# Altium PCB DC-DC_Buck_Converter.PcbDoc
Units mm, origin at the board's own origin, x right, y up, seen from the top; angles counter-clockwise.
Board outline 35 x 20 mm, 2 copper layers (Top Layer, Bottom Layer); 21 components, 14 nets, 80 pads, 0 vias.
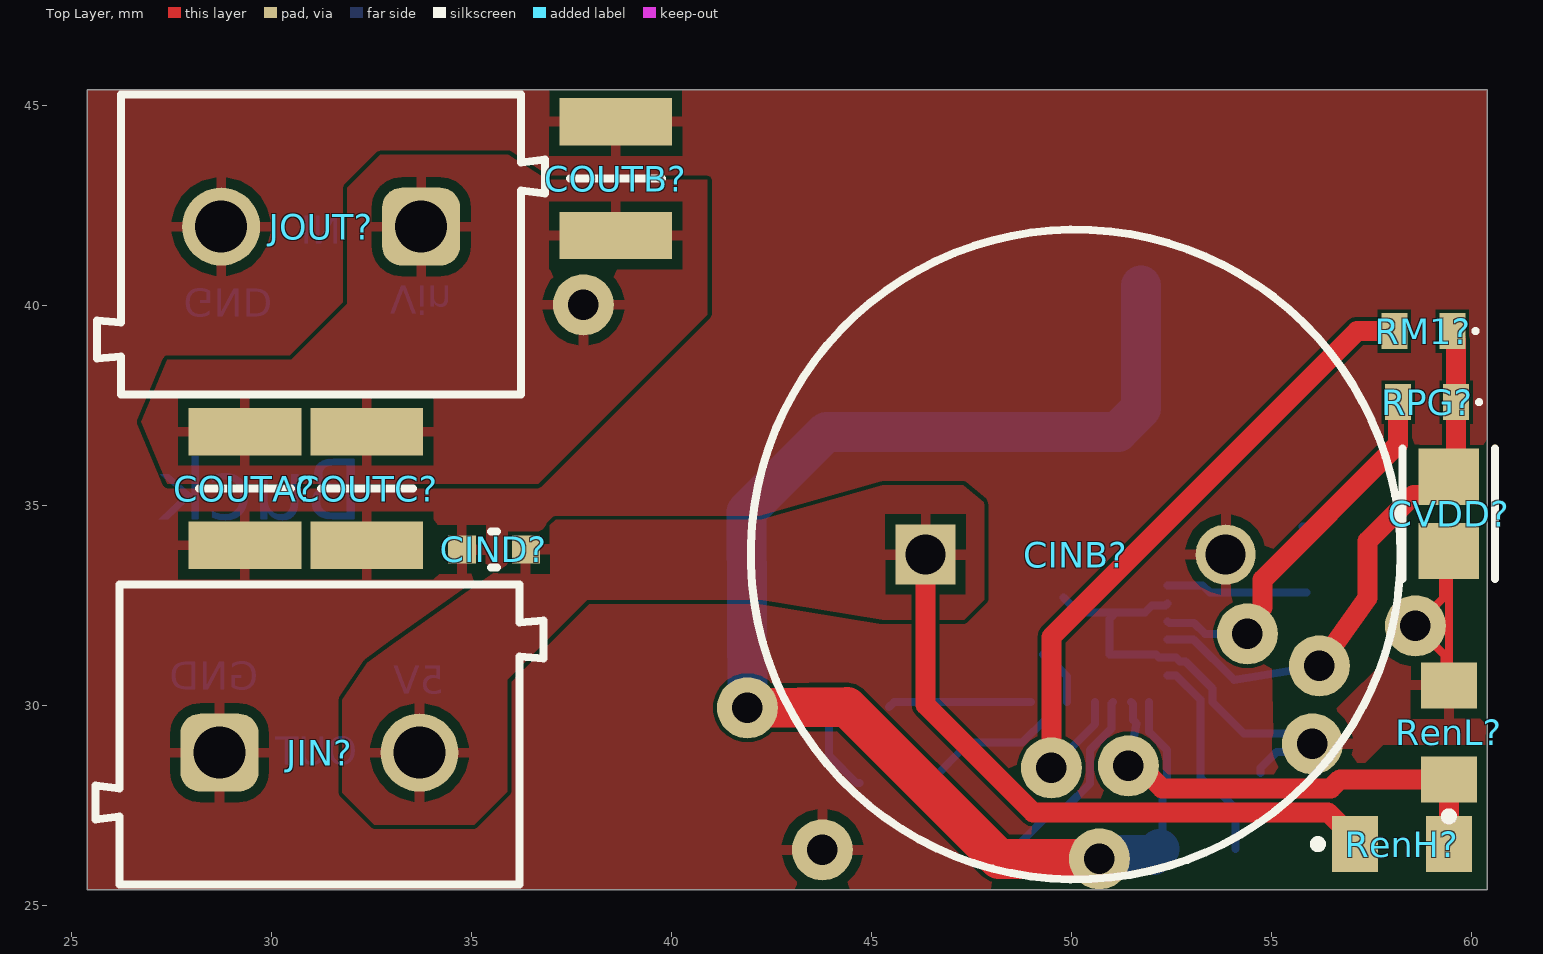
[diagram p0: Top Layer view]
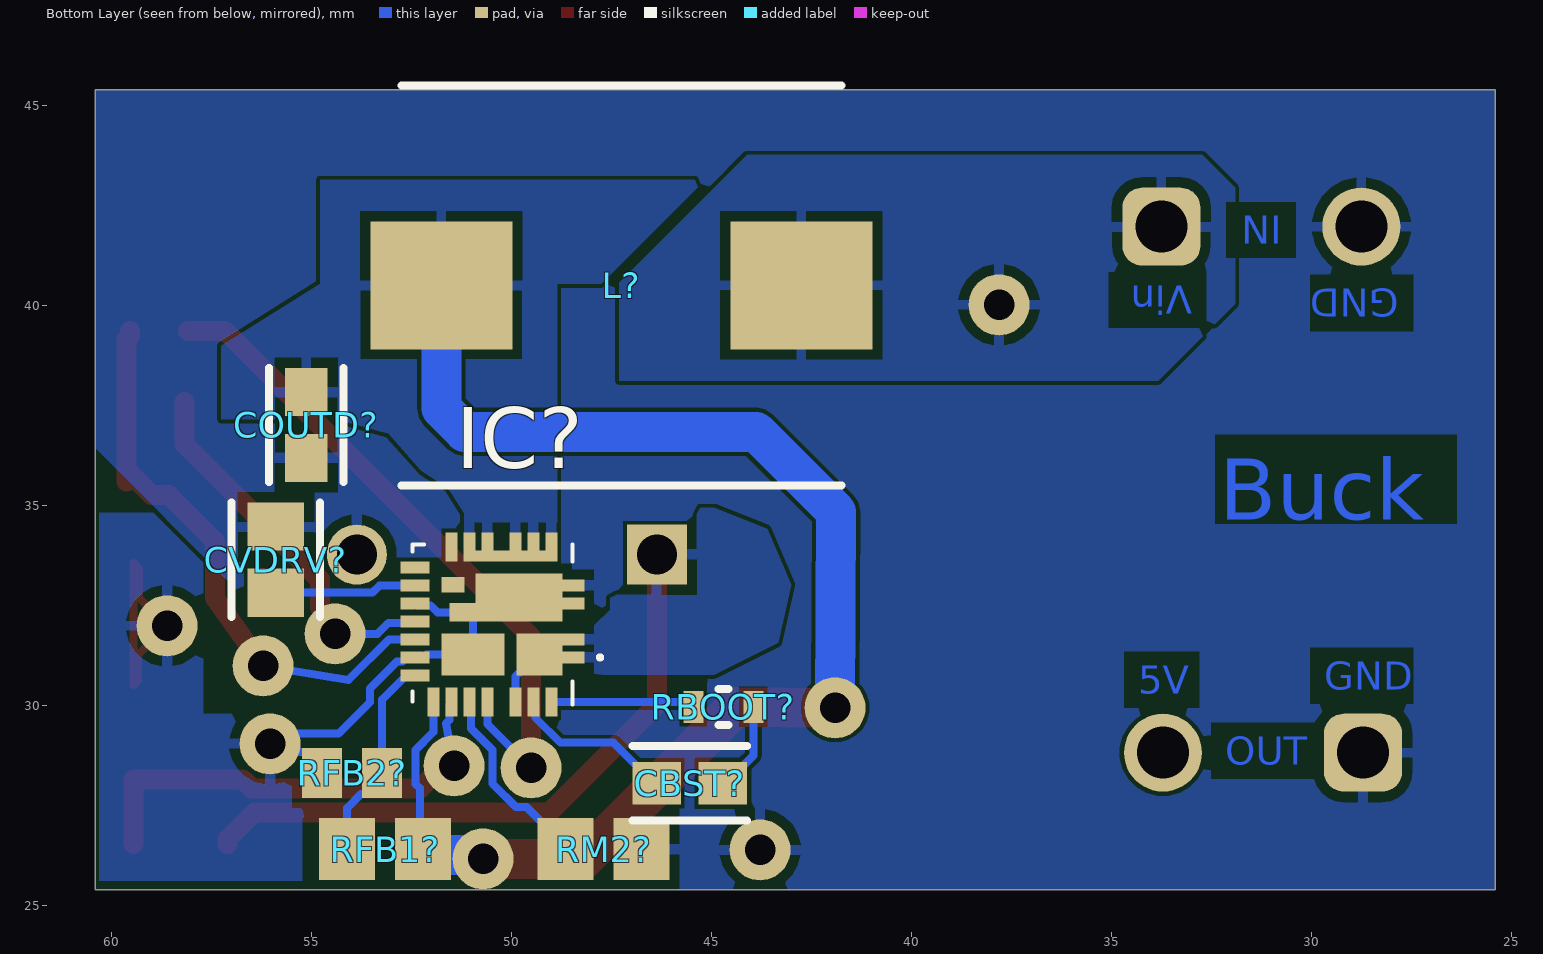
[diagram p1: Bottom Layer view, seen from below]
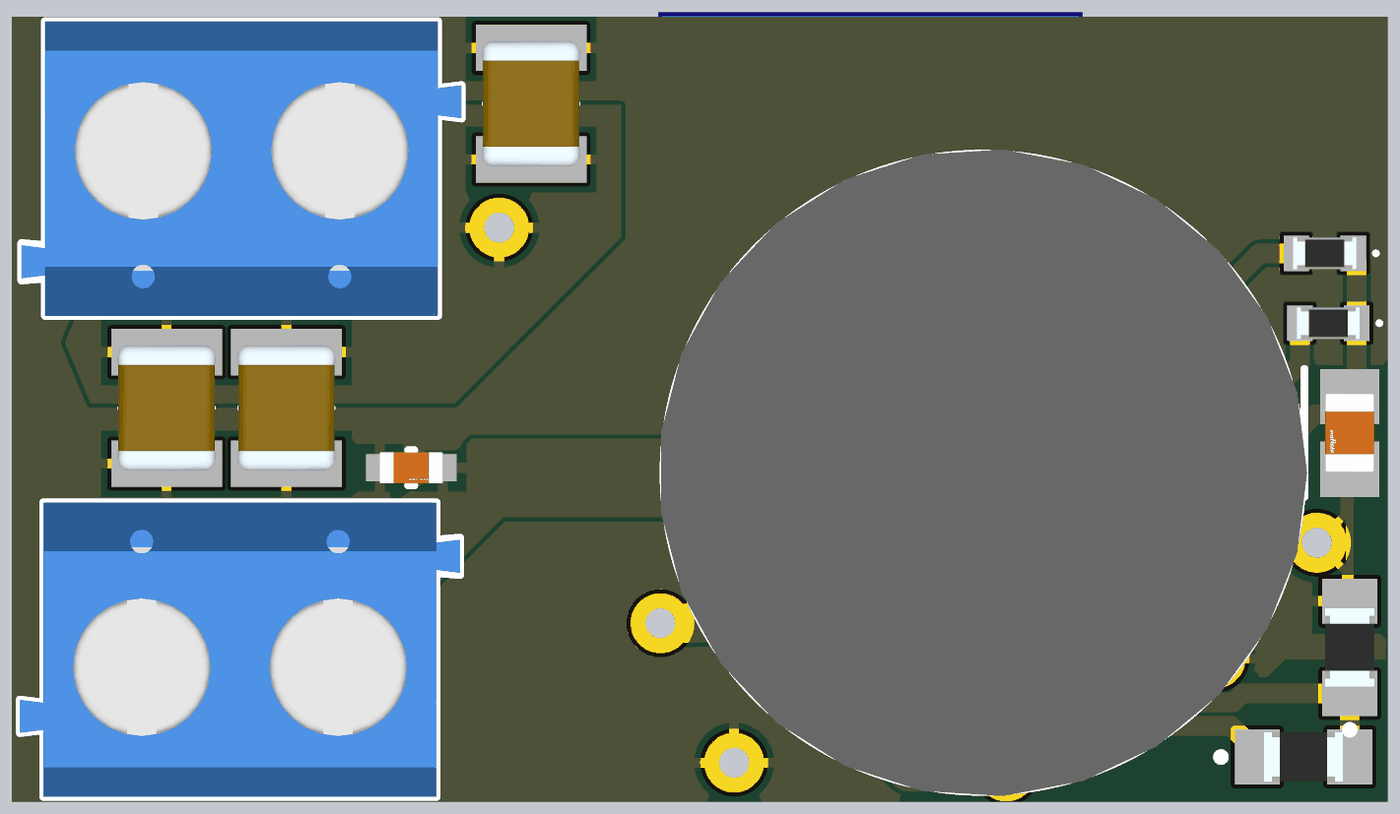
[diagram p2: 3D render of the assembled board from above, using the file's embedded part models]
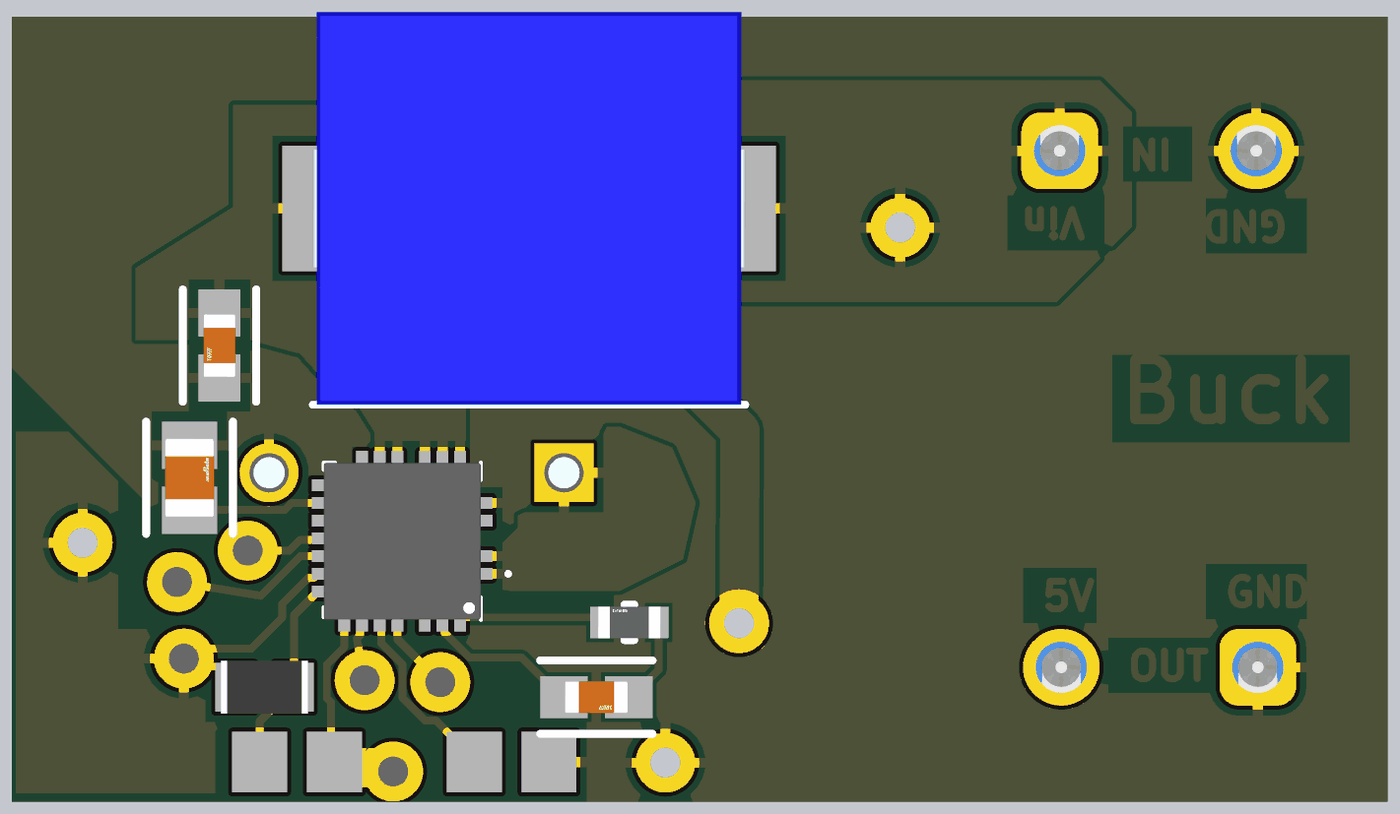
[diagram p3: 3D render of the assembled board from below, using the file's embedded part models]

## Layer stack, top to bottom
Top Solder: solder mask 0.0102, Solder Resist, Dk 3.5
Top Layer: signal copper 0.0356
Dielectric 1: dielectric 0.32, FR-4, Dk 4.8
Bottom Layer: signal copper 0.0356
Bottom Solder: solder mask 0.0102, Solder Resist, Dk 3.5

## Board outline
25.4,25.4 25.4,45.4 60.4,45.4 60.4,25.4

## Design rules (kind name [scope] priority, off if disabled: settings)
Clearance [All] p1: gap=0.1 ignorepadtopadclearanceinfootprint=FALSE
PolygonConnect [All] p1: connectstyle=Relief reliefconductorwidth=0.254 reliefentries=4 polygonreliefangle="90 Angle" airgapwidth=0.254
RoutingVias [All] p1: holewidth=0.711 width=1.27 viastyle="Through Hole" minholewidth=0.711 minwidth=1.27 maxholewidth=0.711 maxwidth=1.27
SolderMaskExpansion [All] p1: expansion=0.102 istentingtop=FALSE
SupplyNets "Schematic Supply Nets" [InNet('GND')] p1: voltage=0.000
Width [All] p1: maxlimit=1 minlimit=0.2 preferedwidth=0.3 minimp=50.000000 maximp=50.000000 favimp=50.000000
30 further rules are at their usual default settings.

## Components (designator, comment, footprint, x,y, rotation, side; value= is the part's Value field where it differs from the comment)
CBST? "0,1uF" FP-0603-L_1_6_0_15-W_0_81-IPC_A 45.53,28.067 r180 bottom
CINB? "150uF" CAPPRD750W80D1625H2150 46.355,33.782 r0 top
CIND? "0.1uF" FP-0603-L_1_6_0_1-W_0_8_0-MFG 35.56,33.909 r180 top
COUTA? "47uF" CAPC3225X279N 29.337,35.433 r270 top
COUTB? "47uF" CAPC3225X279N 38.608,43.18 r90 top
COUTC? "47uF" CAPC3225X279N 32.385,35.433 r270 top
COUTD? "0,1uF" FP-0603-L_1_6_0_15-W_0_81-IPC_A 55.118,37.021 r270 bottom
CVDD? "1uF" FP-GCM21B-0_15-IPC_A 59.436,34.798 r270 top
CVDRV? "4,7uF" FP-GRM219-0_15-0_1-IPC_B 55.88,33.655 r90 bottom
IC? "SiC437AED-T1-GE3" SIC437DEDT1GE3 50.467,32.037 r0 bottom
JIN? "691102710002" 691102710002 31.202,29.279 r0 top
JOUT? "691102710002" 691102710002 31.242,41.529 r180 top
L? "2,2uH 15A" INDPM110100X400N 47.244,40.513 r180 bottom
RBOOT? "2Ω" FP-ESR03-MFG 44.692,29.972 r180 bottom
RenH? "562kΩ" ERJP06D1000V 58.261,26.543 r0 top
RenL? "309kΩ" ERJP06D1000V 59.436,29.337 r90 top
RFB1? "73,2kΩ" RESC2013X60X40ML20T25 53.147,26.416 r180 bottom
RFB2? "10kΩ" RESC2013X60X40LL20T25_A 53.975,28.321 r0 bottom
RM1? "100kΩ" ERA3AEB101V 58.801,39.37 r180 top
RM2? "499kΩ" RESC2013X60X40ML20T25 47.686,26.416 r0 bottom
RPG? "100kΩ" ERA3AEB101V 58.891,37.592 r180 top

## Footprints (in the part's own frame and the unit in brackets; to place one, negate y for a bottom-side part, rotate by r counter-clockwise, add the part's x,y. Pads: shape width x height; smd on the part's side, far side on the other; paste and mask are expansions set on the pad)
691102710002 [mm] "5,00mm - modular - blue - Horizontal entry with pressure clamp - 9,9 mm height - 02p"
  rrect50% 1.95x1.95 hole 1.3: 1(-2.5,-0.45)
  round 1.95 hole 1.3: 2(2.5,-0.45)
  silkscreen extent -5.6,-3.75 5.6,3.75, body extent -5.6,-3.75 5.6,3.75, height 9.96
CAPC3225X279N [mm]
  rect 1.18x2.82 smd: 1(-1.42,0) 2(1.42,0)
  silkscreen extent 0,-1.15 0,1.15, body extent -1.6,-1.25 1.6,1.25, height 2.79
CAPPRD750W80D1625H2150 [mm]
  rect 1.5x1.5 hole 1: 1(0,0)
  round 1.5 hole 1: 2(7.5,0)
  silkscreen extent -4.37,-8.12 11.88,8.12, body extent -4.5,-8.24 12,8.24, height 21.5
ERA3AEB101V [mm]
  rect 0.65x0.9 smd: 1(-0.725,0) 2(0.725,0)
  silkscreen extent -1.35,-0.05 -1.25,0.05, body extent -0.8,-0.4 0.8,0.4, height 0.45
ERJP06D1000V [mm]
  rect 1.15x1.4 smd: 1(-1.175,0) 2(1.175,0)
  silkscreen extent -2.2,-0.1 -2,0.1, body extent -1,-0.63 1,0.63, height 0.6
FP-0603-L_1_6_0_1-W_0_8_0-MFG [mm]
  rect 0.7x0.7 smd paste+0 mask+0: 1(-0.8,0) 2(0.8,0)
  silkscreen extent -0.08,-0.45 0.08,0.45, body extent -0.8,-0.4 0.8,0.4, height 0.9
FP-0603-L_1_6_0_15-W_0_81-IPC_A [mil]
  rect 47.5x42.06 smd paste+0 mask+0: 1(-32.51,0) 2(32.51,0)
  silkscreen extent -56,-37 56,37, body extent -31,-16 31,16, height 35
FP-ESR03-MFG [mm]
  rect 0.5x0.8 smd paste+0 mask+0: 1(-0.75,0) 2(0.75,0)
  silkscreen extent -0.13,-0.45 0.13,0.45, body extent -0.8,-0.4 0.8,0.4, height 0.55
FP-GCM21B-0_15-IPC_A [mm]
  rect 1.406x1.508 smd paste+0 mask+0: 1(-0.926,0) 2(0.926,0)
  silkscreen extent -1.63,-1.15 1.63,1.15, body extent -1,-0.63 1,0.63, height 1.4
FP-GRM219-0_15-0_1-IPC_B [mm]
  rect 1.206x1.408 smd paste+0 mask+0: 1(-0.826,0) 2(0.826,0)
  silkscreen extent -1.43,-1.1 1.43,1.1, body extent -1,-0.63 1,0.63, height 0.95
INDPM110100X400N [mm]
  rect 3.55x3.2 smd: 1(-4.5,0) 2(4.5,0)
  silkscreen extent -5.5,-5 5.5,5, body extent -5.5,-5 5.5,5, height 4
RESC2013X60X40LL20T25_A [mm] "Chip Resistor, 2-Leads, Body 2.20x1.35mm, IPC High Density"
  rect 1x1.25 smd: 1(-0.75,0) 2(0.75,0)
  body extent -1.1,-0.67 1.1,0.67, height 0.6
RESC2013X60X40ML20T25 [mm] "Chip Resistor, 2-Leads, Body 2.00x1.25mm, IPC Low Density"
  rect 1.4x1.55 smd: 1(-0.95,0) 2(0.95,0)
  body extent -1.1,-0.72 1.1,0.72, height 0.6
SIC437DEDT1GE3 [mm]
  rect 0.55x0.3 smd: 1(-2.024,0.826) 2(-2.024,0.376) 3(-2.024,-0.524) 4(-2.024,-0.974)
  rect 0.3x0.45 smd: 5(-1.474,-2.074) 6(-1.024,-2.074) 7(-0.574,-2.074) 8(0.126,-2.074) 9(0.576,-2.074)
  rect 0.3x0.73 smd: 10(1.026,-1.934)
  rect 0.725x0.3 smd: 11(1.938,-1.424) 12(1.938,-0.974) 13(1.938,-0.524) 14(1.938,-0.074) 15(1.938,0.376) 16(1.938,0.826) 17(1.938,1.276)
  rect 0.3x0.725 smd: 18(1.476,1.938) 19(1.026,1.938) 20(0.576,1.938) 21(0.126,1.938) 22(-0.574,1.938) 23(-1.024,1.938) 24(-1.474,1.938)
  rect 1.575x1.05 smd: 25(0.488,0.751)
  rect 1.15x1.05 smd: 26(-1.174,0.751)
  rect 2.175x1.2 smd: 27(-0.662,-0.674)
  rect 0.58x0.38 smd: 28(0.986,-0.989)
  rect 0.65x0.455 smd: 29(0.751,-0.302)
  rect 2.35x0.275 smd: 30(-0.449,-1.712)
  silkscreen extent -2.74,-2 2,2, body extent -2,-2 2,2, height 0.77

## Part data
CBST? COUTD?: library part CMP-2006-04388-2, "06035C104K4Z2A, Automotive Ceramic Capacitor, 0603, 100nF, 10%, X7R, 15%, 50V", Capacitance=100nF, Case Code (Imperial)=0603, Case Code (Metric)=1608, Dielectric=X7R, Max Operating Temperature=125°C, Min Operating Temperature=-55°C, Package Quantity=1, Ratings=AEC-Q200, Tolerance=10%, Voltage Rating=50V, Case/Package=0603, Construction=Flat, Contact Plating=Tin, Depth=0.81mm, Dissipation Factor=2.5%, Features="Soft Termination", Height=0.035mm, Lead Free="Lead Free", Length=1.6mm, Mount="Surface Mount", Number of Pins=2, Packaging="Tape and Reel", Radiation Hardening=No, REACH SVHC="No SVHC", RoHS Compliant=Yes, Series=FLEXITERM®, Termination=SMD/SMT, Thickness=0.037inch, Voltage Rating (DC)=50V, Width=0.81mm
CINB?: library part UCS2C151MHD, "UCS2C151MHD, Aluminum Electrolytic Capacitors - Radial Leaded 160volts 150uF 16X20 20%, Capacitor Polarised", Manufacturer_Name=Nichicon, Mouser Part Number=647-UCS2C151MHD, Arrow Part Number=UCS2C151MHD, Arrow Price/Stock=https://www.arrow.com/en/products/ucs2c151mhd/nichicon, Datasheet Link=https://www.nichicon.co.jp/english/products/pdfs/e-ucs.pdf, Height=21.5mm, Manufacturer_Part_Number=UCS2C151MHD, Mouser Price/Stock=https://www.mouser.com/Search/Refine.aspx?Keyword=647-UCS2C151MHD
CIND?: library part CMP-14477-002194-3, "GMK107BJ104KAHT, Ceramic Capacitor Automotive 0.1uF ±10% 35V X5R 0603", Capacitance=100nF, Case Code (Imperial)=0603, Case Code (Metric)=1608, Dielectric=X5R, Max Operating Temperature=85°C, Min Operating Temperature=-55°C, Ratings=AEC-Q200, Tolerance=10%, Voltage Rating=35V, Case/Package=0603, Halogen Free="Halogen Free", Height=900µm, Lead Free="Lead Free", Length=1.6002mm, Material=Ceramic, Max Length=1.7mm, Max Thickness=900µm, Max Width=900µm, Min Length=1.5mm, Min Thickness=700µm, Min Width=700µm, Mount="Surface Mount", NexarPartId=29103042, Packaging=Digi-Reel®, RoHS=Compliant, Termination=SMD/SMT, Thickness=889µm, Voltage Rating (DC)=35V, Width=800µm
COUTA? COUTB? COUTC?: library part 1210YD476KAT4A, "1210YD476KAT4A, Capacitor, 16V, ripple 2A", Manufacturer_Name="Kyocera AVX", Mouser Part Number=581-1210YD476KAT4A, Datasheet Link=https://eu.mouser.com/datasheet/2/40/cx5r-776519.pdf, Height=2.79mm, Manufacturer_Part_Number=1210YD476KAT4A, Mouser Price/Stock=https://www.mouser.com/Search/Refine.aspx?Keyword=581-1210YD476KAT4A
CVDD?: library part CMP-2007-03345-2, "GCM21BR71E105KA56K, Ceramic Capacitor for Automotive 1uF ±10% 25VDC X7R 0805 Embossed T/R", Case Code (Imperial)=0805, Case Code (Metric)=2012, Dielectric=X7R, Max Operating Temperature=125°C, Min Operating Temperature=-55°C, Package Quantity=10000, Ratings=AEC-Q200, Tolerance=10%, Voltage Rating=25V, Capacitance=1uF, Case/Package=0805, Construction=Flat, Depth=1.25mm, Height=1.25mm, Length=2mm, Mount="Surface Mount", Packaging="Tape and Reel", Radiation Hardening=No, Series=GCM, Termination=SMD/SMT, Thickness=0.055inch, Voltage Rating (DC)=25V, Width=0.049inch
CVDRV?: library part CMP-06035-049019-1, "GRM219R6YA475KA73D, Chip Multilayer Ceramic Capacitors for General Purpose, 0805, 4.7uF, X5R, 15%, 10%, 35V", Capacitance=4.7uF, Case Code (Imperial)=0805, Case Code (Metric)=2012, Dielectric=X5R, Dielectric Material=Ceramic, Max Operating Temperature=85°C, Min Operating Temperature=-55°C, Package Quantity=1, Tolerance=10%, Voltage=35V, Case/Package=0805, Depth=1.25mm, Height=0.85mm, Lead Free="Lead Free", Length=2mm, Material=Ceramic, Mount="Surface Mount", Packaging="Tape and Reel", Termination=SMD/SMT, Thickness=0.037inch, Voltage Rating=35V, Voltage Rating (DC)=35V, Weight=0.000335oz, Width=1.25mm
IC?: "Integrated Circuit", Arrow Part Number=SIC437AED-T1-GE3, Manufacturer_Name=Vishay, Mouser Part Number=78-SIC437AED-T1-GE3, Arrow Price/Stock=https://www.arrow.com/en/products/sic437aed-t1-ge3/vishay?utm_currency=USD&region=nac, Datasheet Link=https://www.mouser.fr/datasheet/2/427/sic437-1670527.pdf, Height=0.8mm, Manufacturer_Part_Number=SiC437AED-T1-GE3, Mouser Price/Stock=https://www.mouser.co.uk/ProductDetail/Vishay-Siliconix/SIC437AED-T1-GE3?qs=chTDxNqvsyloQdgCHbSYaQ%3D%3D
JIN? JOUT?: library part CMP-1502-03258-2, Color=Blue, Current=15A, Max Operating Temperature=105°C, Min Operating Temperature=-40°C, Voltage=300V, Contact Material=Brass, Contact Plating=Tin, Current Rating=15A, Height=13.4mm, Housing Material=Nylon, Lead Pitch=5mm, Length=7.5mm, Mount="Through Hole", NexarPartId=8917706, Number of Contacts=2, Number of Levels=1, Number of Pins=2, Number of Positions Per Level=2, Packaging=Box, Pitch=5.0038mm, Plating=Steel, REACH SVHC=Unknown, RoHS=Compliant, Stripping Length=-6mm, Termination=Screw, Voltage Rating=300V, Width=11.2mm, Wire Gauge (Max)=22AWG, Wire Gauge (Min)=14AWG, Wire/Cable Gauge=22AWG
L?: library part SRP1038CC-2R2M, "SRP1038CC-2R2M, Inductor, 15A", Manufacturer_Name=Bourns, Mouser Part Number=652-SRP1038CC-2R2M, Datasheet Link=https://www.bourns.com/docs/Product-Datasheets/SRP1038CC.pdf, Height=4mm, Manufacturer_Part_Number=SRP1038CC-2R2M, Mouser Price/Stock=https://www.mouser.co.uk/ProductDetail/Bourns/SRP1038CC-2R2M?qs=1Kr7Jg1SGW%252BcvKpILw06dA%3D%3D
RBOOT?: library part CMP-08839-010261-1, "ESR03EZPJ2R0, 2Ω ±5% 0.25W 0603 Anti-Surge Chip Resistor AEC-Q200", Case Code (Imperial)=0603, Case Code (Metric)=1608, Max Operating Temperature=155°C, Max Power Dissipation=250mW, Min Operating Temperature=-55°C, Package Quantity=5000, Resistance=2R, Resistor Type="Thick Film", Temperature Coefficient=200ppm/°C, Tolerance=5%, Case/Package=0603, Features="Automotive AEC-Q200", Height=0.022inch, Length=0.063inch, Number of Terminations=2, Packaging="Cut Tape", RoHS Compliant=Yes, Series=ESR, Width=0.031inch
RenH?: library part ERJ-P06F5623V, "ERJ-P06F5623V, Resistor, 080, 562kΩ , 1% tolerance, 1/2W", Manufacturer_Name=Panasonic, Datasheet Link=http://industrial.panasonic.com/cdbs/www-data/pdf/RDA0000/AOA0000C102.pdf, Height=0.7mm, Manufacturer_Part_Number=ERJ-P06F5623V
RenL?: library part ERJ-P06F3093V, "ERJ-P06F3093V, Resistor, 309kΩ, 1% tolerance, 1/2W, 0805", Manufacturer_Name=Panasonic, Mouser Part Number=667-ERJ-P06F3093V, Datasheet Link=http://industrial.panasonic.com/cdbs/www-data/pdf/RDA0000/AOA0000C102.pdf, Height=0.7mm, Manufacturer_Part_Number=ERJ-P06F3093V, Mouser Price/Stock=https://www.mouser.co.uk/ProductDetail/Panasonic/ERJ-P06F3093V?qs=iIVTEDlrHA1HCCmB5VX2HQ%3D%3D
RFB1?: library part CMP-2001-00876-1, "ERA6AEB7322V, resistor , 73,2kΩ , 0.1% tolerance, 1/8W", Manufacturer=Panasonic, Part Number=ERA6AEB7322V
RFB2?: library part CMP-2001-00582-2, "ERA-6AEB103V, Metal Film Chip Resistor, High Reliability Type, 0.125 W, +/- 0.1%, -55 to 155 degC, 0805 (2012 Metric), RoHS, Tape and Reel", Case Code - in=0805, Case Code - mm=2012, Manufacturer=Panasonic, Operating Temperature Range=-55Cto+155C, Package / Case=0805(2012metric), Package Description="2-Pin Surface Mount Device, Body 2 x 1.25 mm", Power Rating=125mW(1/8W), Resistance=10kOhms, Temperature Coefficient=25PPM/C, Tolerance=0.1%, Voltage Rating=100V, Brand=Panasonic, Datasheet URL=https://industrial.panasonic.com/cdbs/www-data/pdf/RDM0000/AOA0000C307.pdf, Datasheet Version=02/2016, Factory Pack Quantity=5000, Height=0.5mm, Length=2mm, Manufacturer URL=http://www.panasonic.com/, Mounting Technology=SurfaceMount, Package Reference=0805, Packaging=Reel, Product=ThinFilmResistorsSMD, Product Category=ThinFilmResistors-SMD, RoHS=Details, Series=ERA-6A, Termination Style=SMD/SMT, Type=MetalFilmChipResistors, Width=1.25mm
RM1? RPG?: library part ERA-3AED104V, "ERA-3AED104V, 100kΩ, 0,5% tolerance, 1/10W ,75V , Resistor", Manufacturer_Name=Panasonic, Mouser Part Number=667-ERA-3AED104V, Datasheet Link=https://industrial.panasonic.com/cdbs/www-data/pdf/RDM0000/AOA0000C307.pdf, Height=0.55mm, Manufacturer_Part_Number=ERA-3AED104V, Mouser Price/Stock=https://www.mouser.co.uk/ProductDetail/Panasonic/ERA-3AED104V?qs=MNPzkKEzRtQIWcmUWL4kjg%3D%3D
RM2?: library part CMP-2001-00840-1, "ERA6AEB4993V, resistor, 499kΩ, 0.1% tolerance, 100V, 1/8W, 0805", Manufacturer=Panasonic, Part Number=ERA6AEB4993V

## Free pads (board coordinates)
  round 1.524 hole 0.762: 2(51.425,28.5) 3(37.8,40.025) 4(56.025,29.05) 5(49.5,28.45) 6(43.775,26.4) 7(56.2,31) 8(54.4,31.8) 9(58.6,32) 10(50.7,26.175) 12(41.9,29.95)

## Nets (pads, with @x,y where several pads share a name; then routed paths per layer and width w, separated by ;. In a path a pad name is that pad's centre, name@x,y a point inside that pad or via, vN(x,y) a via of type N, cw(c..) or ccw(c..) an arc to the next point about the centre after c; other vN are vias at no path point)
GND: CINB?.2 CIND?.2 COUTA?.2 COUTB?.2 COUTC?.2 COUTD?.2 CVDD?.2 CVDRV?.2 IC?.3 IC?.4 IC?.13 IC?.16 IC?.25 IC?.27 IC?.29 JIN?.1 JOUT?.2 pad.4 pad.6 pad.9 RenL?.2 RFB2?.2 RM2?.1 | length 19.1
  Top Layer w0.2: pad.9 59.33,31.27 59.33,30.618 RenL?.2 59.436,33.581 59.295,33.439 59.295,32.695 pad.9
  Bottom Layer w0.2: IC?.27 50.177,32.339 IC?.29 ; IC?.13 52.355,32.511 52.01,32.511 51.838,32.339 IC?.29 ; RFB2?.2 54.725,28.446 55.125,28.846 55.821,28.846 pad.4 55.772,29.303 54.313,29.303 53.525,30.091 53.525,30.436 52.85,31.111 52.718,31.111 52.618,31.211 52.192,31.211 52.117,31.286 IC?.25 50.955,32.174 51.12,32.339 IC?.29 ; CVDRV?.2@55.779,34.481 CVDRV?.2
  Bottom Layer w1: pad.6 44.009,26.4 pad.6@44.017,26.408
NetCBST?_1: CBST?.1 IC?.23 | length 4.1
  Bottom Layer w0.2: CBST?.1 46.425,28.067 47.435,29.077 48.767,29.077 49.393,29.704 49.393,30.049 IC?.23
NetCBST?_2: CBST?.2 RBOOT?.2 | length 2.3
  Bottom Layer w0.2: RBOOT?.2 43.942,28.76 44.635,28.067 CBST?.2
NetCINB?_1: CINB?.1 CIND?.1 IC?.1 IC?.2 IC?.22 IC?.26 JIN?.2 RenH?.1 | length 17.5
  Top Layer w0.5: CINB?.1 46.355,30.022 49.039,27.338 56.416,27.338 57.086,26.668 RenH?.1
  Bottom Layer w0.2: IC?.26 49.343,31.286 49.893,30.736 IC?.22
NetCOUTA?_1: COUTA?.1 COUTB?.1 COUTC?.1 JOUT?.1 L?.2 pad.3 | length 0.4
  Bottom Layer w0.2: pad.3 pad.3@38.158,40.025
NetCOUTD?_1: COUTD?.1 IC?.5 IC?.6 IC?.7 IC?.8 IC?.9 IC?.18 IC?.30 L?.1 pad.10 pad.12 RFB1?.2 | length 34.7
  Top Layer w1: pad.12 44.388,29.975 48.188,26.175 pad.10
  Bottom Layer w0.2: IC?.18 51.943,29.342 52.387,28.898 52.387,28.048 52.28,27.941 RFB1?.2@52.28,26.499
  Bottom Layer w1: pad.12 41.875,34.85 43.875,36.85 51.158,36.85 51.744,37.436 L?.1 ; pad.10 50.8,26.275 52.056,26.275 RFB1?.2
NetCVDD?_1: CVDD?.1 IC?.15 pad.7 RM1?.1 RPG?.1 | length 14.5
  Top Layer w0.5: pad.7 57.4,32.691 57.4,34.116 58.555,35.271 58.983,35.271 CVDD?.1@59.616,35.904 ; RM1?.1 59.526,39.245 59.616,39.155 RPG?.1 CVDD?.1@59.616,35.613
  Bottom Layer w0.2: IC?.15 53.053,31.661 54.064,30.65 pad.7
NetCVDRV?_1: CVDRV?.1 IC?.12 | length 3.6
  Bottom Layer w0.2: IC?.12 53.282,33.011 53.461,32.832 55.877,32.832 CVDRV?.1
NetIC?_14: IC?.14 pad.8 RPG?.2 | length 9.5
  Top Layer w0.5: pad.8 54.4,32.077 54.782,32.459 54.782,33.153 58.166,36.537 RPG?.2
  Bottom Layer w0.2: IC?.14 52.446,32.07 53.068,32.07 53.338,31.8 pad.8
NetIC?_17: IC?.17 RFB1?.1 RFB2?.1 | length 5.2
  Bottom Layer w0.2: IC?.17 52.618,30.761 53.225,30.154 RFB2?.1 53.225,28.196 53.625,27.796 53.75,27.796 54.097,27.449 RFB1?.1
NetIC?_19: IC?.19 pad.2 RenH?.2 RenL?.1 | length 11.6
  Top Layer w0.5: pad.2 51.702,28.5 52.264,27.938 56.486,27.938 56.71,28.162 RenL?.1 RenH?.2
  Bottom Layer w0.2: pad.2 51.625,29.562 51.543,29.644 51.543,30.049 IC?.19
NetIC?_20: IC?.20 RM2?.2 | length 4.8
  Bottom Layer w0.2: RM2?.2 48.636,26.491 49.614,27.469 49.88,27.469 50.463,28.053 50.463,28.898 51.001,29.436 51.001,30.057 IC?.20
NetIC?_21: IC?.21 pad.5 RM1?.2 | length 17.1
  Top Layer w0.5: pad.5 49.5,31.725 57.145,39.37 RM1?.2
  Bottom Layer w0.2: pad.5 50.593,29.543 IC?.21
NetIC?_24: IC?.24 RBOOT?.1 | length 3.6
  Bottom Layer w0.2: RBOOT?.1 45.569,30.099 IC?.24
pads on no net: IC?.10 IC?.11 IC?.28

## Polygon pours and split planes (outlines as drawn)
GND on Top Layer "GND_L01_P009" (solid, remove dead copper, pour order 9): 25.4,25.4 25.4,45.4 60.4,45.4 60.4,35.814 58.225,35.814 55.004,31.57 55.049,28.752 55.416,27.897 57.05,27.225 60.4,28.194 60.4,25.4
GND on Top Layer "GND_L01_P008" (solid, remove dead copper, pour order 8): 58.05,33.625 58.775,34.35 58.775,34.55 59.475,34.55 60.2,34.55 60.35,34.4 60.4,31.625 60.35,29.025 57.8,29.025 57.35,28.575 55.9,28.575 55.9,29.2 57.975,31.275 58.025,31.275
NetCINB?_1 on Top Layer "NETCINB?_1_L01_P002" (solid, remove dead copper, pour order 2): 31.775,29.115 31.775,27.825 32.575,27.025 35.075,27.025 35.9,27.85 35.9,30.65 37.9,32.65 42.225,32.65 45.275,32.15 47.325,32.15 47.825,32.65 47.825,34.773 47.825,35.378 47.815,35.378 47.752,35.452 47.689,35.514 47.679,35.514 47.825,35.075 47.3,35.514 45.275,35.514 42.225,34.65 35.65,34.65 35.65,33.4 33.027,31.538 32.392,31.072 31.775,30.15
NetCOUTA?_1 on Top Layer "NETCOUTA?_1_L01_P000" (solid, remove dead copper, pour order 0): 27.4,38.65 26.75,37.1 27.4,35.55 36.675,35.55 40.9,39.775 40.9,43.15 36.9,43.15 35.925,43.775 32.725,43.775 31.9,42.95 31.9,40.05 30.5,38.65
GND on Bottom Layer "GND_L02_P010" (solid, remove dead copper, pour order 10): 25.4,25.4 25.4,45.4 60.4,45.4 60.4,36.45 49.945,25.995 49.35,25.4 48.509,25.4
NetCOUTD?_1 on Bottom Layer "NETCOUTD?_1_L02_P007" (solid, remove dead copper, pour order 7): 45.15,43.15 47.75,40.55 48.85,40.55 48.85,33.6 48.966,33.639 50.388,33.6 51.175,33.6 51.175,34.814 51.568,35.44 52.243,35.882 53.075,36.818 53.245,36.856 54.352,37.163 57.25,37.163 57.25,39 54.775,40.55 54.775,43.15
NetCOUTA?_1 on Bottom Layer "NETCOUTA?_1_L02_P006" (solid, remove dead copper, pour order 6): 32.725,43.775 31.9,42.95 31.9,40.05 33.825,38.125 47.3,38.125 47.3,40.575 44.1,43.775
GND on Bottom Layer "GND_L02_P004" (solid, remove dead copper, pour order 4): 53.9,29.175 53.9,28.525 55.225,27.2 55.225,25.625 60.3,25.625 60.3,27.2 60.3,30.025 60.3,32.875 60.3,34.825 58.95,34.825 57.7,33.575 57.7,29.8 54.475,29.8
NetCINB?_1 on Bottom Layer "NETCINB?_1_L02_P003" (solid, remove dead copper, pour order 3): 44.925,34.95 43.6,34.425 43,33.025 43.325,31.575 44.925,30.775 48.8,30.775 48.825,30.75 48.85,30.775 48.85,31.9 48.025,31.9 47.525,32.4 47.525,34.95

## Other copper
Bottom Layer:
  text "IN" at 30.729,42.246 h0.7 r180
  text "Vin" at 32.965,40.496 h0.7 r180
  text "GND" at 27.804,40.421 h0.7 r180
  text "Buck" at 32.3,34.65 h1.52
  text "GND" at 29.671,30.404 h0.7
  text "5V" at 34.321,30.304 h0.7
  text "OUT" at 32.146,28.529 h0.7

## Silkscreen, mask and mechanical layers (free items; w line width, h text height)
Mechanical 1:
  lines w1: 25.4,25.4 34.15,25.4 51.65,25.4 60.4,25.4 60.4,45.4 25.4,45.4 25.4,25.4